# EAGLE board power mux-v9 (EAGLE 6.5.0)
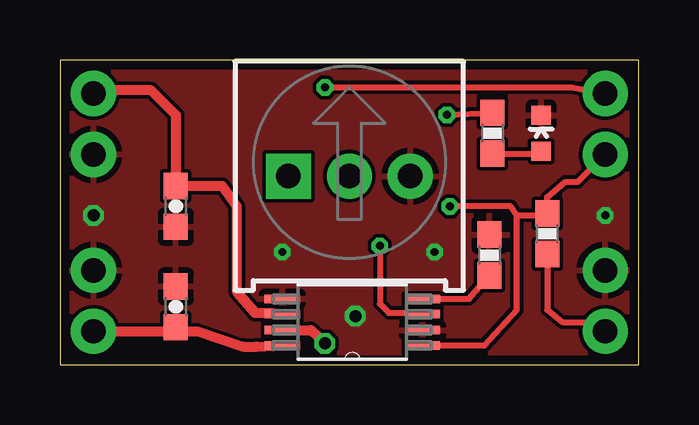
[diagram p0: board, top side]
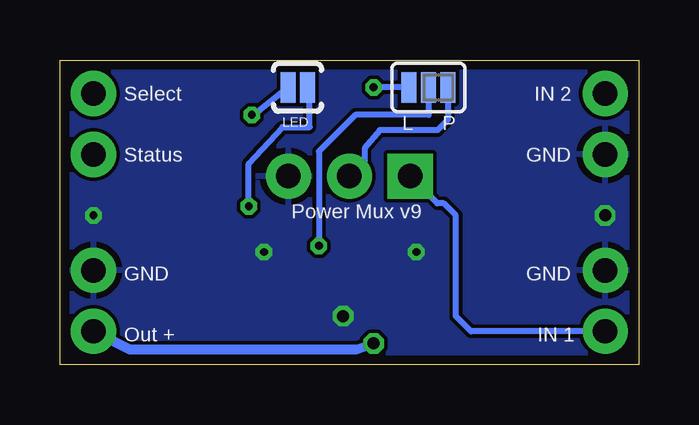
[diagram p1: board, bottom side, seen from below]

Size 24.13 x 12.7 mm. Coordinates in mm from the lower left corner, seen from the top.
Outline: 0,0 24.13,0 24.13,12.7 0,12.7 0,0
Copper layers (1*16): Top 0.0356mm / dielectric 1.5011mm / Bottom 0.0356mm
Design rules "LaenPCBOrder": minimum track width 6mil, minimum drill 13mil, track to track 6mil, track to pad 6mil, pad to pad 6mil, via to via 6mil, smd to smd 6mil, copper to edge 15mil, drill to drill 6mil, minimum pad ring 7mil, minimum via ring 7mil, stop-mask expansion 3mil, vias tented up to drill 0mil, thermal gap 10mil

## Footprints (pad centres in the part's own frame; a part is rotated, then mirrored left to right if it is on the bottom)
0603-CAP = smd 1.1 x 1: 1 -0.85,0; 2 0.85,0
LED-0603 = smd 0.8 x 0.8: A 0,-0.75; C 0,0.75
1X02_NO_SILK = drill 1.016 pad 1.88: 1 0,0; 2 2.54,0
3386U = drill 1.016 pad 1.88 square: 1 -2.54,-0.015 | drill 1.016 pad 1.88: 2 0,-0.015; 3 2.54,-0.015
0603-RES = smd 1.1 x 1: 1 -0.85,0; 2 0.85,0
SJ_3_PASTE1&2 = smd 0.635 x 1.27: 1 -0.813,0; 2 0,0; 3 0.813,0
SJ_2S-NOTRACE = smd 0.635 x 1.27: 1 -0.401,0; 2 0.413,0
SOP65P640X120-8N = smd 1.473 x 0.356: 1 -2.921,0.965; 2 -2.921,0.33; 3 -2.921,-0.33; 4 -2.921,-0.965; 5 2.921,-0.965; 6 2.921,-0.33; 7 2.921,0.33; 8 2.921,0.965

## Placement (x,y rotation side)
C1  1uf  [0603-CAP]  4.83,2.41 270 top
C2  1uf  [0603-CAP]  4.83,6.6 270 top
D1  GREEN  [LED-0603]  20.07,9.65 0 top
JP3  M021X02_NO_SILK  [1X02_NO_SILK]  1.4,3.94 270 top
JP4  M021X02_NO_SILK  [1X02_NO_SILK]  1.4,8.76 90 top
JP5  M021X02_NO_SILK  [1X02_NO_SILK]  22.73,8.76 90 top
JP6  M021X02_NO_SILK  [1X02_NO_SILK]  22.73,3.94 270 top
R1  TRIMPOT-PTH-KNOB  [3386U]  12.06,7.87 0 top
R5  400  [0603-RES]  17.91,4.57 270 top
R6  4.7k  [0603-RES]  20.32,5.46 90 top
R7  180  [0603-RES]  18.03,9.65 270 top
SJ1  [SJ_3_PASTE1&2]  8.76,11.56 180 bottom
SJ2  SOLDERJUMPERNC2  [SJ_2S-NOTRACE]  14.22,11.56 0 bottom
U1  TPS2113APWR  [SOP65P640X120-8N]  12.19,1.78 180 top

## Library data of the parts
C1 C2 R5-R7 SJ1 SJ2 = SparkFun-Passives
D1 = SparkFun-LED; PROD_ID: DIO-00821
JP3-JP6 = SparkFun-Connectors
R1 = SparkFun-Electromechanical
U1 = Texas Instruments_By_element14_Batch_1; MPN: TPS2113APWR; OC_FARNELL: 1757288; OC_NEWARK: 01J0961; PACKAGE: TSSOP-8; SUPPLIER: TEXAS INSTRUMENTS

## Nets
GND: C1.1 C2.2 D1.C JP3.1 JP4.1 JP6.1 R1.3 R5.1 U1.2 U1.5
ILIM: R5.2 U1.4
IN1: C1.2 JP3.2 R1.1 U1.8
IN2: C2.1 JP4.2 U1.6
N$1: D1.A R7.2
N$2: R1.2 SJ1.1
N$3: R7.1 SJ2.1
OUT: JP6.2 R6.1 U1.7
SELECT: JP5.2 SJ1.3
STAT: JP5.1 R6.2 SJ2.2 U1.1
VSENS: SJ1.2 U1.3

## Tracks (layer width: path | path; a pad name or v marks a point on that pad's centre or on a via)
GND  (via drill 0.33, 0.5)
  other vias: 9.27,4.7 1.4,6.22 12.32,2.03 22.73,6.22 15.62,4.7
  pour Bottom: 0,12.7 24.13,12.7 24.13,0 0,0
  pour Top: 0,12.7 24.13,12.7 24.13,0 0,0
ILIM
  Top 0.254: U1.4 17.05,2.74 R5.2
IN1
  Top 0.406: U1.8 8.2,0.76 7.62,0.76 5.71,1.4 4.83,1.4 | JP3.2 4.83,1.4 | 4.83,1.4 C1.2
  Bottom 0.254: JP3.2 6.99,1.4 7.62,2.03 7.62,6.22 8.13,6.73 8.4,6.73 R1.1
IN2
  Top 0.406: U1.6 8.84,2.16 8.13,2.16 7.37,3.05 7.37,6.6 6.77,7.45 C2.1 4.83,10.41 3.81,11.43 1.52,11.43 JP4.2
N$1
  Top 0.254: R7.2 19.77,8.79 D1.A
N$2
  Bottom 0.254: SJ1.1 7.95,10.21 8.38,9.78 10.79,9.78 11.43,9.02 11.43,8.49 R1.2
N$3  (via drill 0.33)
  Top 0.254: v16.13,10.41 R7.1
  Bottom 0.254: v16.13,10.41 15.89,10.54 SJ2.1
OUT  (via drill 0.5)
  Top 0.254: R6.1 20.32,2.29 20.95,1.78 22.35,1.78 JP6.2
  Top 0.406: U1.7 10.46,1.45 v11.05,0.89
  Bottom 0.406: v11.05,0.89 11.81,0.64 21.21,0.64 JP6.2
SELECT  (via drill 0.33)
  Top 0.254: v11.05,11.56 21.34,11.56 JP5.2
  Bottom 0.254: SJ1.3 v11.05,11.56
STAT  (via drill 0.33)
  Top 0.254: U1.1 17.7,0.81 19.05,2.29 19.05,6.22 | 19.05,6.22 18.8,6.6 v16.26,6.6 | 19.05,6.22 20.36,6.22 R6.2 20.32,6.99 21.08,7.62 21.59,7.62 JP5.1
  Bottom 0.254: v16.26,6.6 16.26,8.38 14.86,9.91 13.72,9.91 13.72,11.4 SJ2.2
VSENS  (via drill 0.33)
  Top 0.254: v13.34,4.95 13.34,2.54 13.72,2.16 15.06,2.16 U1.3
  Bottom 0.254: SJ1.2 8.76,10.41 11.81,10.41 13.34,8.89 v13.34,4.95

## Text on the board
bPlace: IN 2 | Select | P | L | LED | GND | Status | Power Mux v9 | GND | GND | IN 1 | Out +